# Allegro board BD9C601EFJEVK-101_BRD_REV00_2014-01-06.brd
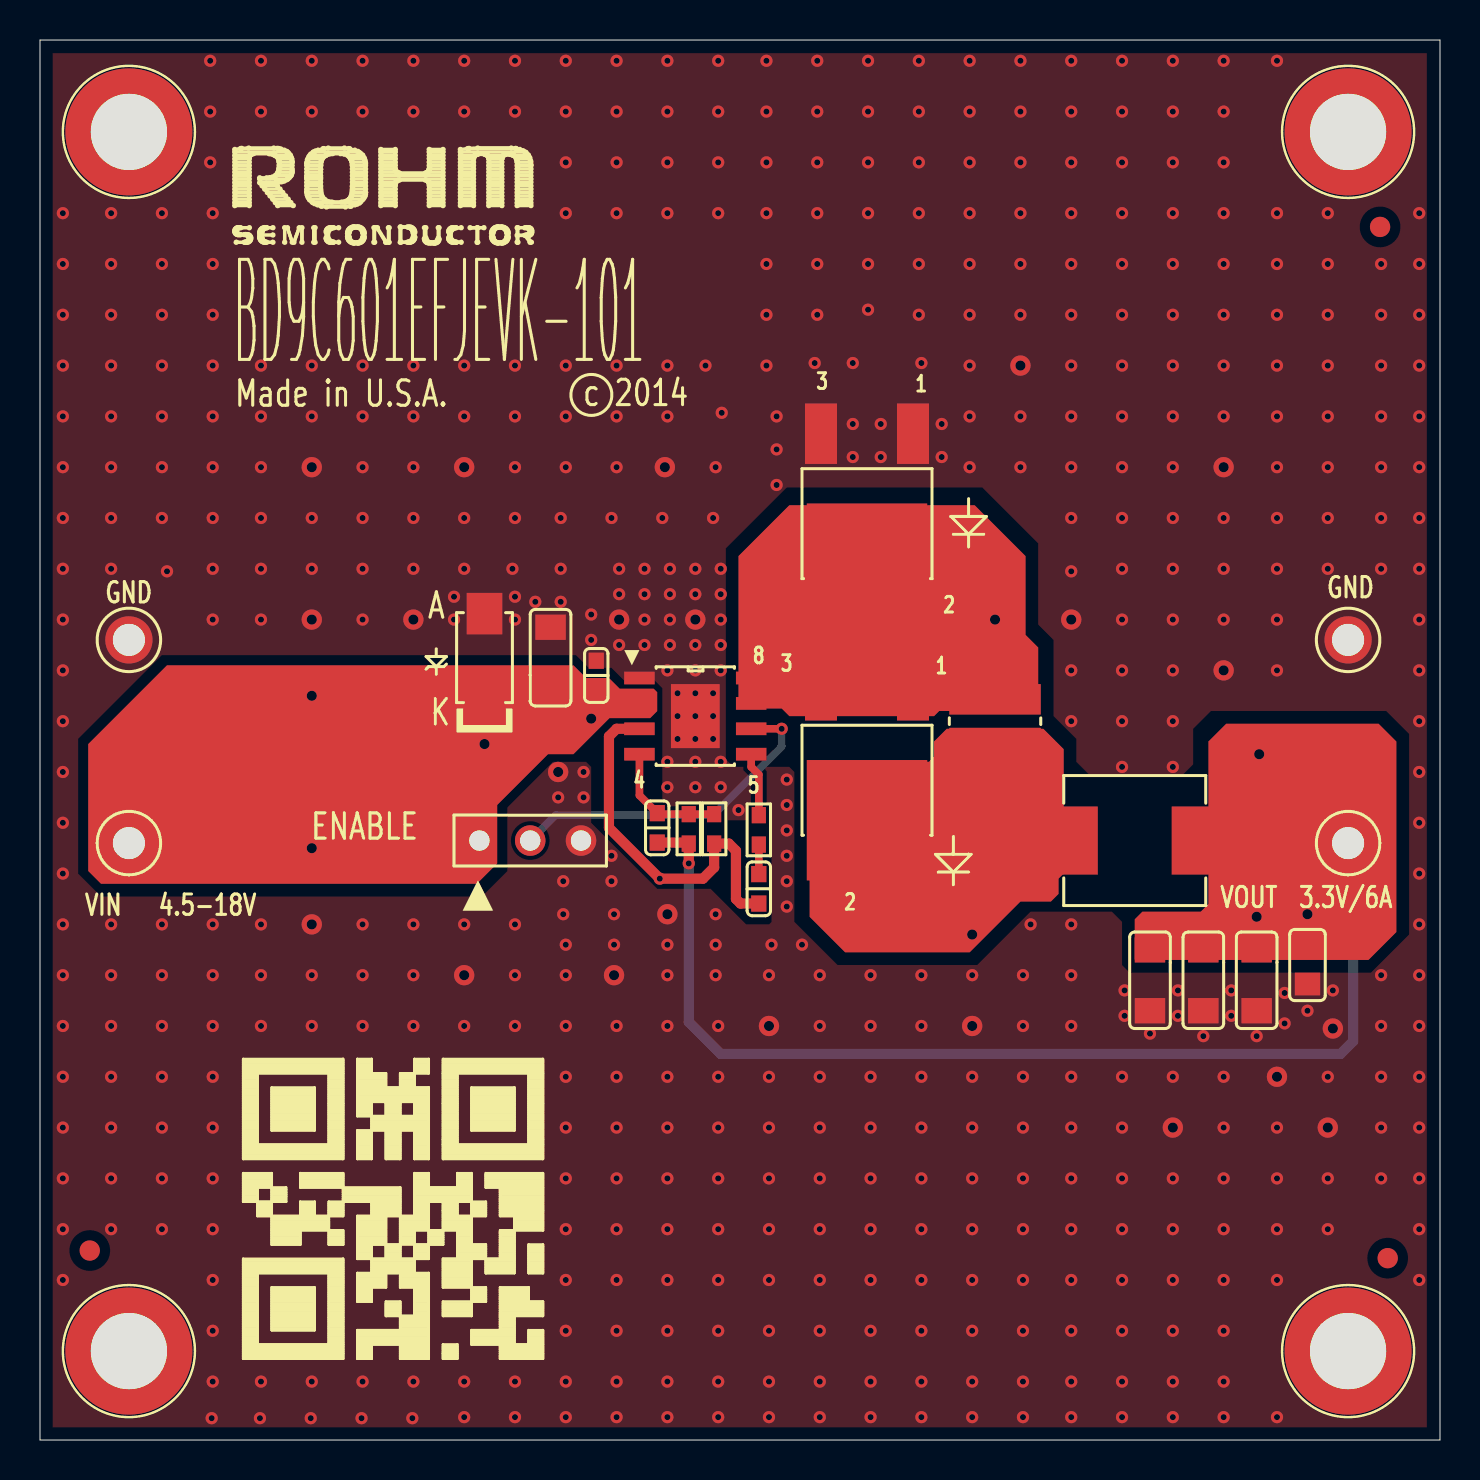
[diagram p0: board, top side]
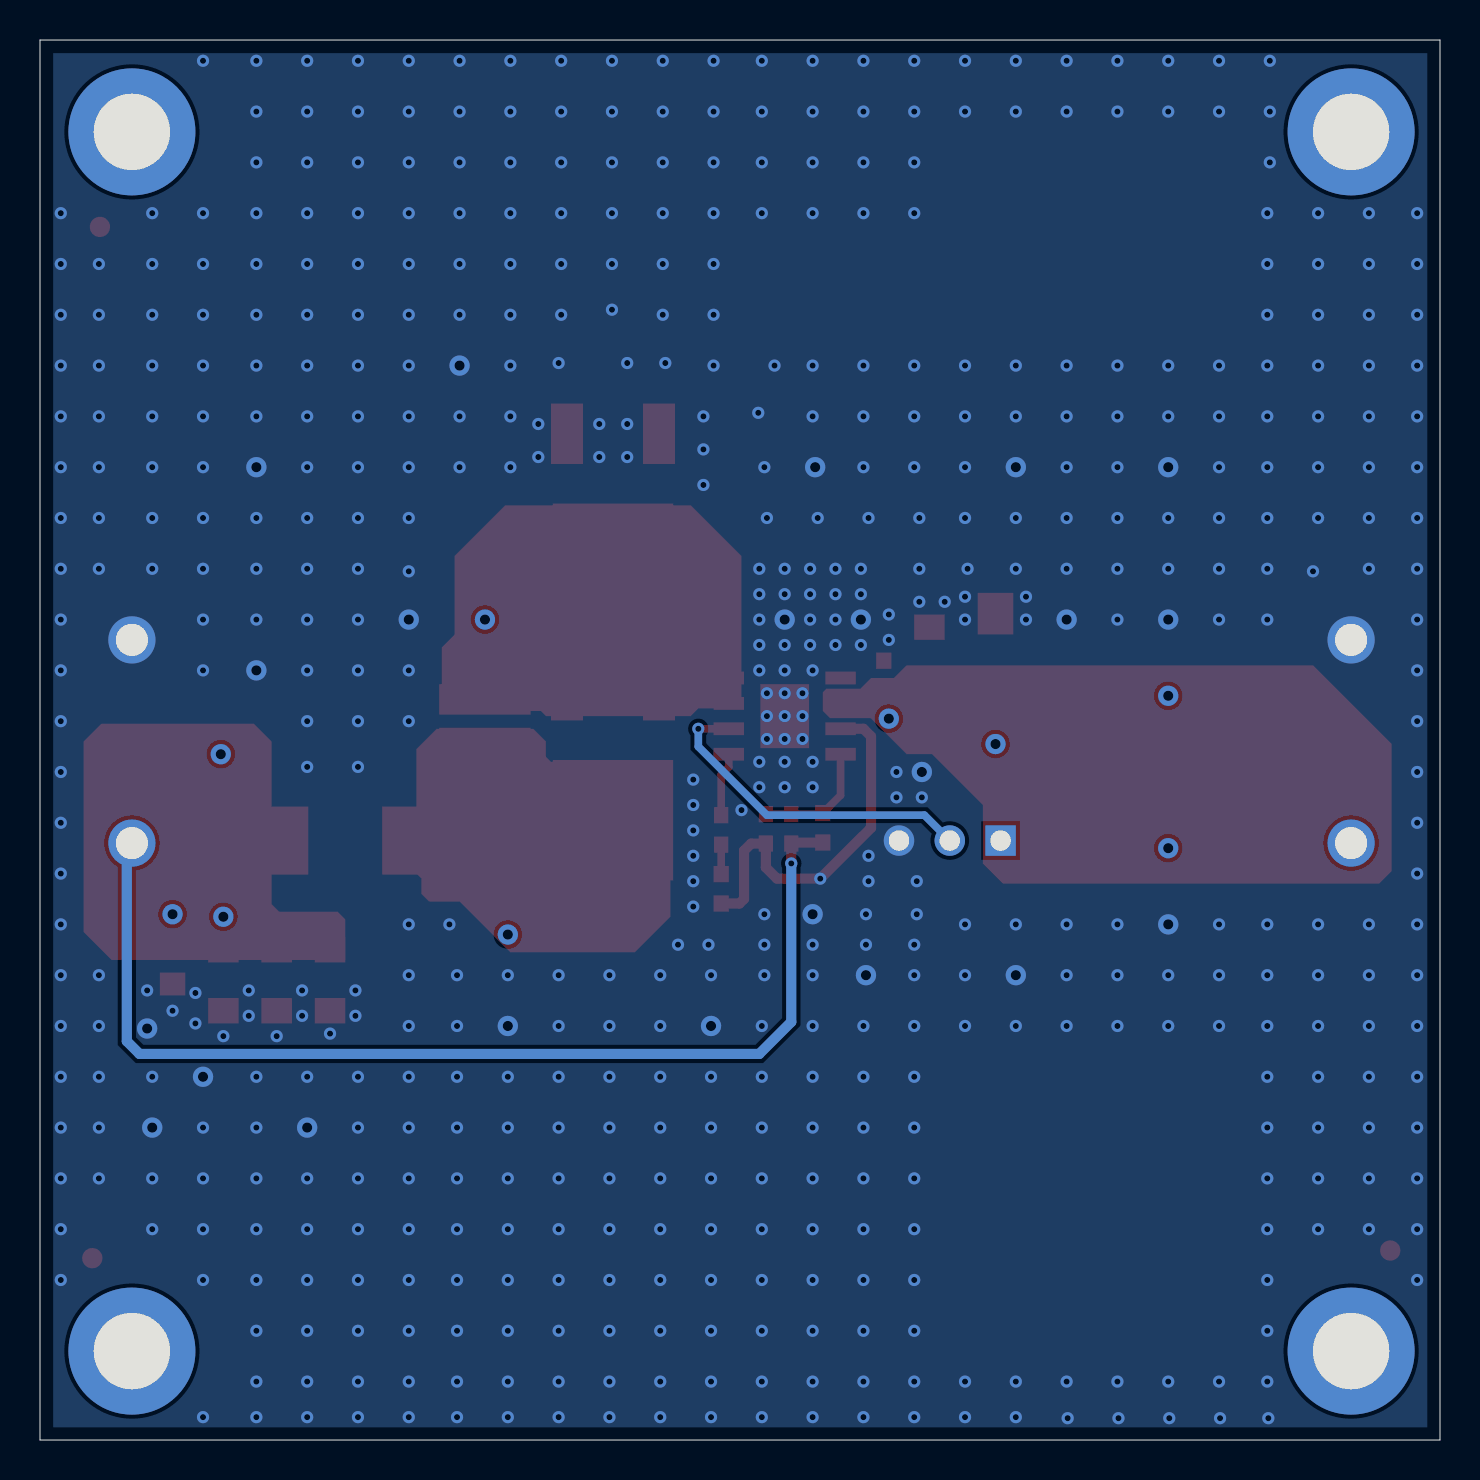
[diagram p1: board, bottom side, seen from below]

Outline 70 x 70 mm; copper layers: TOP, L2_GND, L3_GND, BOTTOM. Coordinates in mm from the lower left corner of the outline.
Outline path: 0,70 0,0 70,0 70,70 0,70

## Placement (name value [footprint] x y rotation side)
C1  0.1uF  [C0603]  27.81 38.23 270 top
C2  10uF  [C1206]  25.53 39.12 90 top
C3  22uF  [C1206]  60.83 22.99 270 top
C4  22uF  [C1206]  58.17 22.99 270 top
C5  Val  [C0603]  30.86 30.61 90 top
C6  1500pF  [C0603]  35.94 27.56 90 top
C7  Val  [C1206]  55.5 22.99 270 top
C8  Val  [C0805]  63.37 23.75 270 top
D1  RB085B-30TL  [CPD]  41.35 34.24 180 top
D2  SMAJ15A  [DO-214AC]  22.23 39.12 90 top
D3  RB085B-30TL  [CPD]  41.35 47.07 180 top
J1  87224-3  [HDR_THVT_1X3_100]  21.97 29.97 0 top
L1  3.3uH  [SMT_7P1X6P5]  54.74 29.97 0 top
NOREF  -  [unnamed]  2.49 9.47 0 top
NOREF#2  -  [#2]  65.41 4.45 0 top
NOREF#3  -  [#2]  4.45 4.45 0 top
NOREF#4  -  [unnamed]  67 60.65 0 top
NOREF#5  -  [#2]  70 0 90 top
NOREF#6  -  [unnamed#3]  65.41 4.45 0 top
NOREF#7  -  [#2]  4.45 65.41 0 top
NOREF#8  -  [#2]  -12.5 -32.37 0 top
NOREF#9  -  [#2]  0 70 0 top
NOREF#10  -  [#2]  4.45 4.45 0 top
NOREF#11  -  [unnamed]  67.39 9.09 0 top
NOREF#12  -  [unnamed#3]  4.45 65.41 0 top
NOREF#13  -  [unnamed#3]  65.41 65.41 0 top
NOREF#14  -  [unnamed#3]  4.45 4.45 0 top
R1  20K  [R0603]  35.94 30.51 90 top
R2  7.5K  [R0603]  32.44 30.56 90 top
R3  2.4K  [R0603]  33.71 30.56 90 top
TP1  TP_63Mil_TH  [TP_TH]  4.45 29.84 0 top
TP2  TP_63Mil_TH  [TP_TH]  4.45 40.01 0 top
TP3  TP_63Mil_TH  [TP_TH]  65.41 29.84 0 top
TP4  TP_63Mil_TH  [TP_TH]  65.41 40.01 0 top
U1  BD9C401EFJ  [HTSOP-J8]  32.77 36.2 270 top
ZX1  0  [SM_180X060]  47.75 35.94 90 top

## Library data of the parts
C1-C4 C6-C8 = CAP_VER
C5 = CAP_HOZ
D1 D3 = DIODE_RB085B-30TL_30V/10A_DNP
D2 = DIODE_ZENER_18.2V_400W
J1 = CONN PCB 3x1_.100"
L1 = IND_2.2uH_8.2A
R1 R3 = R_VER
R2 = R_HOZ
TP1-TP4 = TP_63Mil_TH
U1 = IC_BD9C601EFJ_HTSOP-J8
ZX1 = ZX0603_0

## Footprints (pads in the part's own frame, mm; a bottom-side part is the same pattern mirrored in y, then rotated)
C0603
  rect 0.813x0.762 smd: 1(0.737,0) 2(-0.737,0)
C0805
  rect 1.143x1.27 smd: 1(-0.953,0) 2(0.953,0)
C1206
  rect 1.27x1.524 smd: 1(-1.524,0) 2(1.524,0)
CPD
  rect 1.6x3.023 smd: 1(-2.3,-3.25) 3(2.3,-3.25)
  rect 6.02x6.02 smd: 2(0,3.25)
DO-214AC
  rect 2.083x1.778 smd: 1(-2.2,0) 2(2.2,0)
HDR_THVT_1X3_100
  rect 1.524x1.524 hole 1.016: 1(0,0)
  round 1.524 hole 1.016: 2(2.54,0) 3(5.08,0)
HTSOP-J8
  rect 0.635x1.524 smd: 1(-1.905,-2.794) 2(-0.635,-2.794) 3(0.635,-2.794) 4(1.905,-2.794) 5(1.905,2.794) 6(0.635,2.794) 7(-0.635,2.794) 8(-1.905,2.794)
  rect 3.2x2.438 smd: 9(0,0)
R0603
  rect 0.813x0.711 smd: 1(0.737,0) 2(-0.737,0)
SM_180X060
  rect 1.524x4.572 smd: 1(1.092,0) 2(-1.092,0)
SMT_7P1X6P5
  rect 1.854x3.404 smd: 1(-2.775,0) 2(2.775,0)
TP_TH
  round 2.362 hole 1.6: 1(0,0)
unnamed
  round 1.016 smd: 1(0,0)
unnamed#3
  round 6.35 hole 3.81: (0,0)

## Nets
GND: C1.2 C2.2 C3.2 C4.2 C6.2 C7.2 C8.2 D2.2(A) D3.1 D3.3 J1.3 R3.2 TP2.1 TP4.1 U1.1(PGND) U1.3(AGND) U1.9(THERMAL PAD)
VIN: C1.1 C2.1 D2.1(C) J1.1 TP1.1 U1.2(VIN)
COMP: R1.1 U1.5(COMP)
COMP_R: C6.1 R1.2
EN: J1.2 U1.6(EN)
FB: C5.1 R2.1 R3.1 U1.4(FB)
SW: D1.1 D1.3 D3.2 U1.7(SW1) U1.8(SW2) ZX1.1
SW_ZX: D1.2 L1.1 ZX1.2
VOUT: C3.1 C4.1 C5.2 C7.1 C8.1 L1.2 R2.2 TP3.1

Pads without a net: NOREF 1; NOREF#4 1; NOREF#11 1

## Via types
v1: diameter 1.016, hole 0.508, TOP to BOTTOM, 31 vias
v2: diameter 0.61, hole 0.305, TOP to BOTTOM, 560 vias

## Routing (per net, layer and track width the routed paths; a pad name or vN(x,y) marks a point on that pad's centre or on a via; arc(x,y) is an arc through that point)
GND: length 49.9
  TOP w0.508: C6.2 35.03,26.82 34.8,27.05 34.8,29.46 34.44,29.82 R3.2 33.71,28.63 33.15,28.07 v2(30.99,28.07) 28.45,30.61 28.45,35.18 28.83,35.56 U1.3
  L2_GND w0.508: 64.39,38.99 TP4.1 ; TP4.1 64.39,41.02 ; TP4.1 66.42,41.02 ; TP4.1 66.42,38.99 ; 3.43,38.99 TP2.1 ; TP2.1 3.43,41.02 ; TP2.1 5.46,41.02 ; TP2.1 5.46,38.99 ; J1.3 27.77,30.69 ; J1.3 26.34,29.26 ; J1.3 27.77,29.26 ; J1.3 26.34,30.69
  L3_GND w0.508: 64.39,41.02 TP4.1 ; TP4.1 66.42,41.02 ; TP4.1 64.39,38.99 ; TP4.1 66.42,38.99 ; J1.3 27.77,30.69 ; J1.3 26.34,29.26 ; J1.3 26.34,30.69 ; J1.3 27.77,29.26 ; TP2.1 5.46,38.99 ; TP2.1 5.46,41.02 ; TP2.1 3.43,41.02 ; TP2.1 3.43,38.99
  vias: v1(13.59,48.64) v1(13.59,41.02) v1(13.59,25.78) v1(18.67,41.02) v1(21.21,48.64) v1(21.21,23.24) v1(25.91,33.4) v1(28.7,23.24) v1(28.96,41.02) v1(31.24,48.64) v1(31.37,26.29) v1(32.77,41.02) v1(36.45,20.7) v1(46.61,20.7) v1(49.02,53.72) v1(51.56,41.02) v1(56.64,15.62) v1(59.18,48.64) v1(59.18,38.48) v1(61.85,18.16) v1(64.39,15.62) v1(64.64,20.57) v2(1.14,61.34) v2(1.14,58.8) v2(1.14,56.26) v2(1.14,53.72) v2(1.14,51.18) v2(1.14,48.64) v2(1.14,46.1) v2(1.14,43.56) v2(1.14,41.02) v2(1.14,38.48) v2(1.14,35.94) v2(1.14,33.4) v2(1.14,30.86) v2(1.14,28.32) v2(1.14,25.78) v2(1.14,23.24) v2(1.14,20.7) v2(1.14,18.16) v2(1.14,15.62) v2(1.14,13.08) v2(1.14,10.54) v2(1.14,8) v2(3.56,61.34) v2(3.56,58.8) v2(3.56,56.26) v2(3.56,53.72) v2(3.56,51.18) v2(3.56,48.64) v2(3.56,46.1) v2(3.56,43.56) v2(3.56,25.78) v2(3.56,23.24) v2(3.56,20.7) v2(3.56,18.16) v2(3.56,15.62) v2(3.56,13.08) v2(3.56,10.54) v2(6.1,61.34) v2(6.1,58.8) v2(6.1,56.26) v2(6.1,53.72) v2(6.1,51.18) v2(6.1,48.64) v2(6.1,46.1) v2(6.1,25.78) v2(6.1,23.24) v2(6.1,20.7) v2(6.1,18.16) v2(6.1,15.62) v2(6.1,13.08) v2(6.1,10.54) v2(6.35,43.43) v2(8.51,68.96) v2(8.51,66.42) v2(8.51,63.88) v2(8.58,1.09) v2(8.64,61.34) v2(8.64,58.8) v2(8.64,56.26) v2(8.64,53.72) v2(8.64,51.18) v2(8.64,48.64) v2(8.64,46.1) v2(8.64,43.56) v2(8.64,41.02) v2(8.64,25.78) v2(8.64,23.24) v2(8.64,20.7) v2(8.64,18.16) v2(8.64,15.62) v2(8.64,13.08) v2(8.64,10.54) v2(8.64,8) v2(8.64,5.46) v2(8.64,2.92) v2(11.05,68.96) v2(11.05,66.42) v2(11.05,53.72) v2(11.05,51.18) v2(11.05,48.64) v2(11.05,46.1) v2(11.05,43.56) v2(11.05,41.02) v2(11.05,25.78) v2(11.05,23.24) v2(11.05,20.7) v2(11.05,2.92) v2(11,1.09) v2(13.59,68.96) v2(13.59,66.42) v2(13.59,53.72) v2(13.59,51.18) v2(13.59,46.1) v2(13.59,43.56) v2(13.59,23.24) v2(13.59,20.7) v2(13.59,2.92) v2(13.54,1.09) v2(16.08,1.09) v2(16.13,68.96) v2(16.13,66.42) v2(16.13,53.72) v2(16.13,51.18) v2(16.13,48.64) v2(16.13,46.1) v2(16.13,43.56) v2(16.13,41.02) v2(16.13,25.78) v2(16.13,23.24) v2(16.13,20.7) v2(16.13,2.92) v2(18.67,68.96) v2(18.67,66.42) v2(18.67,53.72) v2(18.67,51.18) v2(18.67,48.64) v2(18.67,46.1) v2(18.67,43.56) v2(18.67,25.78) v2(18.67,23.24) v2(18.67,20.7) v2(18.67,2.92) v2(18.62,1.09) v2(20.7,42.16) v2(20.7,41.02) v2(21.21,68.96) v2(21.21,66.42) v2(21.21,53.72) v2(21.21,51.18) v2(21.21,46.1) v2(21.21,43.56) v2(21.21,25.78) v2(21.21,20.7) v2(21.21,2.92) v2(21.21,1.14) v2(23.62,43.56) v2(23.75,68.96) v2(23.75,66.42) v2(23.75,53.72) v2(23.75,51.18) v2(23.75,48.64) v2(23.75,46.1) v2(23.75,42.16) v2(23.75,41.02) v2(23.75,25.78) v2(23.75,23.24) v2(23.75,20.7) v2(23.75,2.92) v2(23.75,1.14) v2(24.77,41.91) v2(25.91,32.13) v2(26.04,46.1) v2(26.04,43.56) v2(26.04,41.91) v2(26.16,27.94) v2(26.16,26.29) v2(26.29,68.96) v2(26.29,66.42) v2(26.29,63.88) v2(26.29,61.34) v2(26.29,53.72) v2(26.29,51.18) v2(26.29,48.64) v2(26.29,24.77) v2(26.29,23.24) v2(26.29,20.7) v2(26.29,18.16) v2(26.29,15.62) v2(26.29,13.08) v2(26.29,10.54) v2(26.29,8) v2(26.29,5.46) v2(26.29,2.92) v2(26.29,1.14) v2(27.18,33.4) v2(27.18,32.13) v2(27.56,41.27) v2(27.56,40.01) v2(28.57,46.1) v2(28.57,29.21) v2(28.57,27.94) v2(28.7,26.29) v2(28.7,24.77) v2(28.83,68.96) v2(28.83,66.42) v2(28.83,63.88) v2(28.83,61.34) v2(28.83,53.72) v2(28.83,51.18) v2(28.83,48.64) v2(28.83,20.7) v2(28.83,18.16) v2(28.83,15.62) v2(28.83,13.08) v2(28.83,10.54) v2(28.83,8) v2(28.83,5.46) v2(28.83,2.92) v2(28.83,1.14) v2(28.96,43.56) v2(28.96,42.29) v2(28.96,39.75) v2(30.23,43.56) v2(30.23,42.29) v2(30.23,41.02) v2(30.23,39.75) v2(31.12,46.1) v2(31.37,68.96) v2(31.37,66.42) v2(31.37,63.88) v2(31.37,61.34) v2(31.37,53.72) v2(31.37,51.18) v2(31.37,38.48) v2(31.37,33.91) v2(31.37,32.64) v2(31.37,24.77) v2(31.37,23.24) v2(31.37,20.7) v2(31.37,18.16) v2(31.37,15.62) v2(31.37,13.08) v2(31.37,10.54) v2(31.37,8) v2(31.37,5.46) v2(31.37,2.92) v2(31.37,1.14) v2(31.5,43.56) v2(31.5,42.29) v2(31.5,41.02) v2(31.5,39.75) v2(31.88,37.34) v2(31.88,36.2) v2(31.88,35.05) v2(32.77,43.56) v2(32.77,42.29) v2(32.77,39.75) v2(32.77,38.48) v2(32.77,37.34) v2(32.77,36.2) v2(32.77,35.05) v2(32.77,33.91) v2(32.77,32.64) v2(33.27,53.72) v2(33.66,46.1) v2(33.66,37.34) v2(33.66,36.2) v2(33.66,35.05) v2(33.78,48.64) v2(33.78,26.29) v2(33.78,24.77) v2(33.78,23.24) v2(33.91,68.96) v2(33.91,66.42) v2(33.91,63.88) v2(33.91,61.34) v2(33.91,20.7) v2(33.91,18.16) v2(33.91,15.62) v2(33.91,13.08) v2(33.91,10.54) v2(33.91,8) v2(33.91,5.46) v2(33.91,2.92) v2(33.91,1.14) v2(34.09,51.36) v2(34.04,43.56) v2(34.04,42.29) v2(34.04,41.02) v2(34.04,39.75) v2(34.04,38.48) v2(34.04,33.91) v2(34.04,32.64) v2(34.92,31.5) v2(36.32,68.96) v2(36.32,66.42) v2(36.32,63.88) v2(36.32,61.34) v2(36.32,58.8) v2(36.32,56.26) v2(36.32,53.72) v2(36.45,23.24) v2(36.45,18.16) v2(36.45,15.62) v2(36.45,13.08) v2(36.45,10.54) v2(36.45,8) v2(36.45,5.46) v2(36.45,2.92) v2(36.45,1.14) v2(36.58,24.77) v2(36.83,51.18) v2(36.83,49.53) v2(36.83,47.75) v2(37.34,33.02) v2(37.34,31.75) v2(37.34,30.48) v2(37.34,29.21) v2(37.34,27.94) v2(37.34,26.67) v2(38.1,24.77) v2(38.73,53.85) v2(38.86,68.96) v2(38.86,66.42) v2(38.86,63.88) v2(38.86,61.34) v2(38.86,58.8) v2(38.86,56.26) v2(38.99,23.24) v2(38.99,20.7) v2(38.99,18.16) v2(38.99,15.62) v2(38.99,13.08) v2(38.99,10.54) v2(38.99,8) v2(38.99,5.46) v2(38.99,2.92) v2(38.99,1.14) v2(40.64,53.85) v2(40.64,50.8) v2(40.64,49.15) v2(41.4,68.96) v2(41.4,66.42) v2(41.4,63.88) v2(41.4,61.34) v2(41.4,58.8) v2(41.4,56.52) v2(41.53,23.24) v2(41.53,20.7) v2(41.53,18.16) v2(41.53,15.62) v2(41.53,13.08) v2(41.53,10.54) v2(41.53,8) v2(41.53,5.46) v2(41.53,2.92) v2(41.53,1.14) v2(42.04,50.8) v2(42.04,49.15) v2(43.94,68.96) v2(43.94,66.42) v2(43.94,63.88) v2(43.94,61.34) v2(43.94,58.8) v2(43.94,56.26) v2(44.07,53.85) v2(44.07,23.24) v2(44.07,20.7) v2(44.07,18.16) v2(44.07,15.62) v2(44.07,13.08) v2(44.07,10.54) v2(44.07,8) v2(44.07,5.46) v2(44.07,2.92) v2(44.07,1.14) v2(45.09,50.8) v2(45.09,49.15) v2(46.48,68.96) v2(46.48,66.42) v2(46.48,63.88) v2(46.48,61.34) v2(46.48,58.8) v2(46.48,56.26) v2(46.48,53.72) v2(46.48,51.18) v2(46.48,48.64) v2(46.61,23.24) v2(46.61,18.16) v2(46.61,15.62) v2(46.61,13.08) v2(46.61,10.54) v2(46.61,8) v2(46.61,5.46) v2(46.61,2.92) v2(46.61,1.14) v2(49.02,68.96) v2(49.02,66.42) v2(49.02,63.88) v2(49.02,61.34) v2(49.02,58.8) v2(49.02,56.26) v2(49.02,51.18) v2(49.02,48.64) v2(49.15,23.24) v2(49.15,20.7) v2(49.15,18.16) v2(49.15,15.62) v2(49.15,13.08) v2(49.15,10.54) v2(49.15,8) v2(49.15,5.46) v2(49.15,2.92) v2(49.15,1.14) v2(49.53,25.78) v2(51.56,68.96) v2(51.56,66.42) v2(51.56,63.88) v2(51.56,61.34) v2(51.56,58.8) v2(51.56,56.26) v2(51.56,53.72) v2(51.56,51.18) v2(51.56,48.64) v2(51.56,46.1) v2(51.56,43.43) v2(51.56,38.48) v2(51.56,35.94) v2(51.56,25.78) v2(51.56,23.24) v2(51.56,20.7) v2(51.56,18.16) v2(51.56,15.62) v2(51.56,13.08) v2(51.56,10.54) v2(51.56,8) v2(51.56,5.46) v2(51.56,2.92) v2(51.56,1.14) v2(54.1,68.96) v2(54.1,66.42) v2(54.1,63.88) v2(54.1,61.34) v2(54.1,58.8) v2(54.1,56.26) v2(54.1,53.72) v2(54.1,51.18) v2(54.1,48.64) v2(54.1,46.1) v2(54.1,43.56) v2(54.1,41.02) v2(54.1,38.48) v2(54.1,35.94) v2(54.1,33.66) v2(54.1,18.16) v2(54.1,15.62) v2(54.1,13.08) v2(54.1,10.54) v2(54.1,8) v2(54.1,5.46) v2(54.1,2.92) v2(54.1,1.14) v2(54.23,22.48) v2(54.23,21.21) v2(55.5,20.32) v2(56.64,68.96) v2(56.64,66.42) v2(56.64,63.88) v2(56.64,61.34) v2(56.64,58.8) v2(56.64,56.26) v2(56.64,53.72) v2(56.64,51.18) v2(56.64,48.64) v2(56.64,46.1) v2(56.64,43.56) v2(56.64,41.02) v2(56.64,38.48) v2(56.64,35.94) v2(56.64,33.66) v2(56.64,18.16) v2(56.64,13.08) v2(56.64,10.54) v2(56.64,8) v2(56.64,5.46) v2(56.64,2.92) v2(56.64,1.14) v2(56.9,22.48) v2(56.9,21.21) v2(58.17,20.19) v2(59.18,68.96) v2(59.18,66.42) v2(59.18,63.88) v2(59.18,61.34) v2(59.18,58.8) v2(59.18,56.26) v2(59.18,53.72) v2(59.18,51.18) v2(59.18,46.1) v2(59.18,43.56) v2(59.18,41.02) v2(59.18,18.16) v2(59.18,15.62) v2(59.18,13.08) v2(59.18,10.54) v2(59.18,8) v2(59.18,5.46) v2(59.18,2.92) v2(59.18,1.14) v2(59.56,22.48) v2(59.56,21.21) v2(60.83,20.19) v2(61.85,68.96) v2(61.85,61.34) v2(61.85,58.8) v2(61.85,56.26) v2(61.85,53.72) v2(61.85,51.18) v2(61.85,48.64) v2(61.85,46.1) v2(61.85,43.56) v2(61.85,41.02) v2(61.85,38.48) v2(61.85,15.62) v2(61.85,13.08) v2(61.85,10.54) v2(61.85,8) v2(61.85,1.14) v2(62.23,22.35) v2(62.23,20.83) v2(63.37,21.46) v2(64.39,61.34) v2(64.39,58.8) v2(64.39,56.26) v2(64.39,53.72) v2(64.39,51.18) v2(64.39,48.64) v2(64.39,46.1) v2(64.39,43.56) v2(64.39,18.16) v2(64.39,13.08) v2(64.39,10.54) v2(64.64,22.48) v2(67.06,58.8) v2(67.06,56.26) v2(67.06,53.72) v2(67.06,51.18) v2(67.06,48.64) v2(67.06,46.1) v2(67.06,43.56) v2(67.06,23.24) v2(67.06,20.7) v2(67.06,18.16) v2(67.06,15.62) v2(67.06,13.08) v2(68.96,61.34) v2(68.96,58.8) v2(68.96,56.26) v2(68.96,53.72) v2(68.96,51.18) v2(68.96,48.64) v2(68.96,46.1) v2(68.96,43.56) v2(68.96,41.02) v2(68.96,38.48) v2(68.96,35.94) v2(68.96,33.4) v2(68.96,30.86) v2(68.96,28.32) v2(68.96,25.78) v2(68.96,23.24) v2(68.96,20.7) v2(68.96,18.16) v2(68.96,15.62) v2(68.96,13.08) v2(68.96,10.54) v2(68.96,8)
VIN:
  vias: v1(13.59,37.21) v1(13.59,29.59) v1(22.23,34.8) v1(27.56,36.07)
COMP: length 3.2
  TOP w0.381: U1.5 35.56,33.66 35.94,33.27 R1.1
COMP_R: length 1.5
  TOP w0.381: C6.1 R1.2
EN: length 16.9
  TOP w0.381: U1.6 v2(37.08,35.56)
  BOTTOM w0.381: v2(37.08,35.56) 37.08,34.67 33.66,31.24 25.78,31.24 J1.2
FB: length 6.2
  TOP w0.381: R3.1 R2.1 30.91,31.29 C5.1 29.97,32.23 U1.4
SW:
  vias: v1(47.75,41.02)
SW_ZX:
  vias: v1(46.61,25.27)
VOUT: length 54.7
  TOP w0.508: C5.2 32.39,29.87 R2.2 v2(32.44,28.83)
  BOTTOM w0.508: v2(32.44,28.83) 32.44,20.9 34.04,19.3 65.02,19.3 65.66,19.94 65.66,29.59 TP3.1
  vias: v1(60.83,26.16) v1(60.96,34.29) v1(63.37,26.29)

## Copper pours and planes (outline as drawn; the poured copper is in the pictures)
GND on TOP: 0.64,69.34 0.64,0.64 69.34,0.64 69.34,69.34 ; 2 cut-outs
GND on BOTTOM: 69.34,0.64 69.34,69.34 0.64,69.34 0.64,0.64
GND on L2_GND, L3_GND: 0.64,69.34 0.64,0.64 69.34,0.64 69.34,69.34
VIN on TOP (solid shape): 27.3,38.1 28.45,38.1 28.98,37.57 30.68,37.57 30.86,37.39 30.86,36.45 30.51,36.09 28.47,36.09 26.67,34.29 25.4,34.29 22.86,31.75 22.86,28.83 21.84,27.81 3.05,27.81 2.41,28.45 2.41,34.8 6.35,38.73 26.67,38.73
SW on TOP (solid shape): 49.28,44.2 49.28,40.26 49.91,39.62 49.91,36.45 44.96,36.45 44.7,36.2 37.47,36.2 37.08,36.58 34.92,36.58 34.92,44.2 37.47,46.74 46.74,46.74
SW_ZX on TOP (solid shape): 51.18,34.54 51.18,31.62 52.83,31.62 52.83,28.32 51.18,28.32 50.93,28.07 50.93,27.3 50.55,26.92 49.02,26.92 46.48,24.38 40.26,24.38 38.48,26.16 38.48,33.78 38.61,33.91 44.45,33.91 44.7,34.16 44.7,34.92 45.34,35.56 50.16,35.56
VOUT on TOP (solid shape): 67.82,34.92 67.82,25.4 66.42,24 54.74,24 54.74,26.04 55.12,26.42 58.04,26.42 58.42,26.8 58.42,28.32 56.64,28.32 56.64,31.62 58.42,31.62 58.42,34.92 59.31,35.81 66.93,35.81

## Text on the board
Ref Des/Silkscreen Top: VIN | GND | 4.5-18V | VOUT | 3.3V/6A | Made in U.S.A. | ENABLE | c 2014 | BD9C601EFJEVK-101
L2_GND: L2_GND
L3_GND: L3_GND
PAGE_OUTLINE: REV | DESCRIPTION | REVISIONS | DATE | APPROVED | D | C | B | A | 4 | 3 | 2
DIMENSION: 2.581 | .175
User.5: .1 | .03 | .010 | DECIMAL | UNLESS OTHERWISE | SPECIFIED DIMENSIONS | ARE IN INCHES | TOLERANCES | ANGLE | MACH FINISH | 30 | X | XX | XXX | DESIGNER: | CHECKER: | JOB#: | DATE: | 2014-01-06 | PTHVDC | INITIAL | COMPANY NAME: | PROJECT NAME: | SHEET: | REV. | ROHM SEMICONDUCTOR USA | BD9C601EFJEVK-101 | 00
User.18: FAB NUMBER: | FAB DRAWING | NUMBER | 1 OF 2 | 14. Rounding is allowed on 90 degree corners with the size of | 12. Inside corners should be rounded-off | 13. Changes to board geometries and apertures are not | 10. Bow and Twist | 11. Inspection | standard routing bit. | allowed unless they are approved by customer. | 4. Drilling | 5. Finish | 9. Packaging | 8. Cleanliness | 7. Electrical Test | 3. Soldermask | photoimageable soldermask, 003 max. thickness. | Soldermask over bare copper. | Soldermask is allowed in via holes. | Bow and twist to be .007 IN/IN or .090 max according to IPC-A-600D. | NOTES: | 2. Material | 6. Silkscreen | to conduct a thorough review of the artwork and media for | writing (in advance of manufacturing) of any changes, revisions,or | 1. Specifications. | as meaxured by the omega meter 600SMD. | A. All hole diameters are finished sizes. | B. All hole to be +/- .003 from true position unless otherwise specified. | C. All hole diameters to be +/- .003 unless otherwise specified. | D. An NC drill file has been supplied - see drill table. | A. Plate thru with copper .0010 min to .002 max. thickness drill size | dimension apply after plating. | B. Use gold immersion over nickel. | C. Finished boards shall not have nicks, | scratches, voids, exposed copper, poor plating, all misdrilled holes. | manufacturability in the supplier's process compliance to all | A. Boards shall be free of fiber glass dust or any other foreign material. | B. Finished boards must conform to 0.01 MG/IN max NAcL ionic contamination | A. All boards shall be 100% electrically tested for opens/short at 10 volts. | MIL-SPEC boards to be tested at 40 volts. | B. Apply test stamp in non-legend area on solder side of PCB. | C. Test is required on both sides of the board. | Solder mask both sides with (green color) liquid | A. FR406. | B. Color to be opaque. | A. Silkscreen using white non-conductive epoxy or equivalent (both sides). | B. No silkscreen allowed on exposed lands. | C. Silkscreen must be a minimum of 3mm away form fiducial marks. | D. Minimum clearance between silkscreen legend and vias, pads, or holes | to be .005. | E. Silkscreen is allowed in via holes. | There shall be a max of 25 units per package, individually wrapped, | and shipped in cardboard cratons with sufficient surrounding | material to prevend shipping damage. | A.Automatic optical inspection of all layers required. | B.The impedance should be controlled by stackup layer. | gerber and drill data when applicable. | A. Fabricate IAW  IPC600, latest revision. | B. Producibility study - It is the respondsibility  of the supplier | corrections made or recommendations to ensure conformance to | D. This drawing is to be used in conjunction with the provided | E. All notes are "Unless Otherwise Specified." | standards, and of  any specifications that  cannot be met. | applicable specifications. Customer must be advised in
User.30: Layer name | Prepreg | BOTTOM | L3_GND | TOP | L2_GND | L | 1 | TOTAL 62 MILs +/-10% thickness board | a | - | y | 4 | e | r | s | 41.20 | 2.70 | 5.00 | T | ( | m | h | C | i | c | u | l | k | ) | . | D | P | w | 2 oz | t | H | F | o | z | p | V
User.31: FIGURE | SIZE | 12.0 | 20.0 | 40.0 | 63.0 | 150.0 | DRILL CHART: TOP to BOTTOM | ALL UNITS ARE IN MILS | TOLERANCE | +3.0/-10.0 | +3.0/-3.0 | PLATED | QTY | 560 | 31 | 3 | 4
